# Altium PCB BRK7360.PcbDoc (part 2 of 3)
Units mil, origin at the board's own origin, x right, y up, seen from the top; angles counter-clockwise.
Board outline 7086.61 x 3956.69 mil, 4 copper layers (L1-Top, L2-Plane-1, L3-Plane-2, L4-Bottom), stack 61.722 mil thick; 106 components, 276 nets, 968 pads, 441 vias.
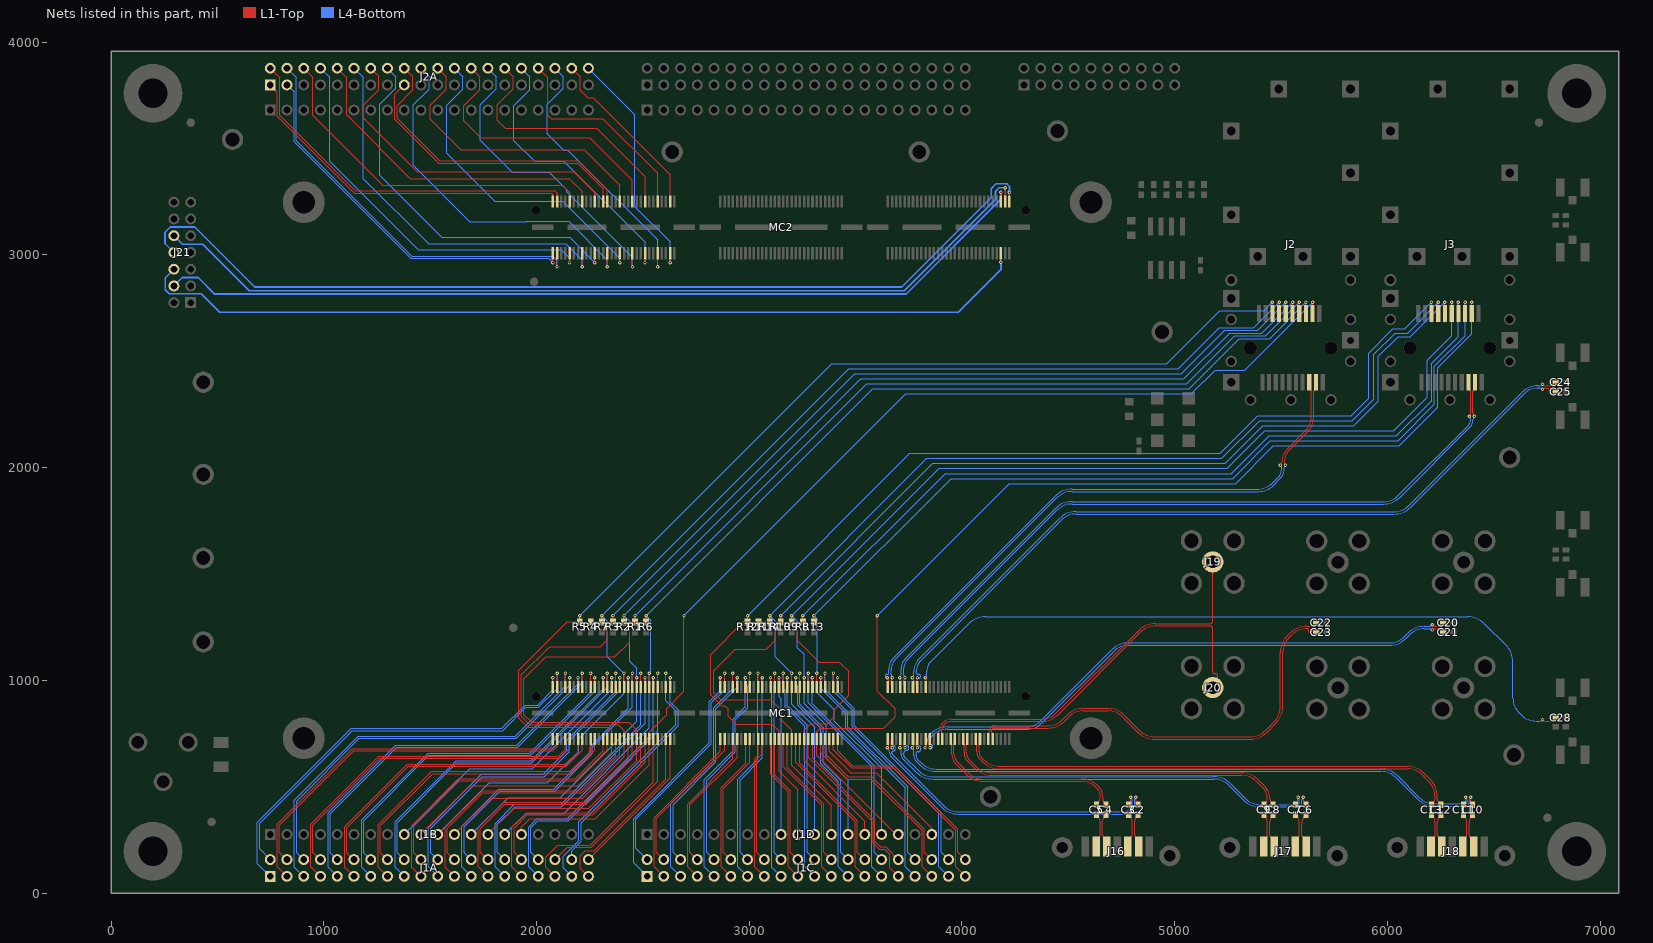
[diagram p4: the nets of this part, all layers, seen from the top]

## Via types
v1: diameter 16, hole 8, L1-Top to L4-Bottom, tented both sides, 441 vias

## Nets (pads, with @x,y where several pads share a name; then routed paths per layer and width w, separated by ;. In a path a pad name is that pad's centre, name@x,y a point inside that pad or via, vN(x,y) a via of type N, cw(c..) or ccw(c..) an arc to the next point about the centre after c; other vN are vias at no path point) (continued)
GTX115_TXN1: C25.2 MC1.135 | length 3671.3
  L1-Top w5.24: MC1.135@3789.37,968.11 cw(c3797.51,976.25) 3786,976.25 3786,999.93 cw(c3803.07,999.93) v1(3791,1012) ; v1(6729,2368) cw(c6744.43,2352.57) 6744.43,2374.39 6764,2374.39 cw(c6764,2356.02) 6776.99,2369.01 6785.17,2360.83 ccw(c6792,2367.66) C25.2@6792,2358
  L4-Bottom w5.24: v1(3791,1012) ccw(c3792,1012.02) 3792,1011 3800,1011 ccw(c3800,1016) 3805,1016 3805,1020 ccw(c3796,1020) 3796,1029 3793,1029 cw(c3793,1037) 3785,1037 3785,1040 cw(c3862.25,1040) 3807.63,1094.63 4465.49,1752.49 cw(c4536.2,1681.78) 4536.2,1781.78 6030.71,1781.78 ccw(c6030.71,1893) 6109.36,1814.36 6642.09,2347.09 cw(c6708,2281.18) 6708,2374.39 6713.57,2374.39 cw(c6713.57,2352.57) v1(6729,2368)
GTX115_TXN2: J3.19 MC1.129 | length 3447.2
  L1-Top w5.24: MC1.129@3730.32,968.11 cw(c3738.32,976.12) 3727,976.12 3727,999.93 cw(c3744.07,999.93) v1(3732,1012) ; v1(6409,2242) cw(c6425.74,2258.74) 6402.07,2258.74 6402.07,2356.92 cw(c6412.08,2356.92) 6405,2364 ccw(c6387.61,2381.39) 6412.2,2381.39 J3.19@6412.2,2401.57
  L4-Bottom w5.24: v1(3732,1012) cw(c3746.49,1026.49) 3726,1026.49 3726,1058 cw(c3776.7,1058) 3740.85,1093.85 4446.49,1799.49 cw(c4517.2,1728.78) 4517.2,1828.78 5980.58,1828.78 ccw(c5980.58,1940) 6059.22,1861.36 6387.17,2189.3 ccw(c6349.9,2226.57) 6402.61,2226.57 cw(c6424.43,2226.57) v1(6409,2242)
GTX115_TXN3: J2.19 MC1.123 | length 2825.8
  L1-Top w5.24: MC1.123@3671.26,987.13 MC1.123@3671.26,968.11 cw(c3679.13,975.98) 3668,975.98 3668,999.93 cw(c3685.07,999.93) v1(3673,1012) ; v1(5521,2012) 5519.95,2013.05 cw(c5531.9,2025) 5515,2025 cw(c5594.99,2025) 5538.43,2081.56 5621.46,2164.59 ccw(c5542.81,2243.24) 5654.04,2243.24 5654.04,2359.26 cw(c5660.74,2359.26) 5656,2364 ccw(c5636.27,2383.73) 5664.17,2383.73 J2.19@5664.17,2401.57
  L4-Bottom w5.24: v1(3673,1012) cw(c3687.49,1026.49) 3667,1026.49 3667,1050.72 cw(c3735.28,1050.72) 3687,1099 4446.49,1858.49 cw(c4517.2,1787.78) 4517.2,1887.78 5394.23,1887.78 ccw(c5394.23,1987.78) 5464.94,1917.07 5494.94,1947.07 ccw(c5445.96,1996.04) 5515.22,1996.04 5515.22,2001.63 cw(c5531.37,2001.63) v1@5519.95,2013.05
GTX115_TXP0: C28.2 MC1.139 | length 3494.4
  L1-Top w5.24: v1(3827,1012) cw(c3814.93,999.93) 3832,999.93 3832,975.98 cw(c3820.87,975.98) MC1.139@3828.74,968.11 ; v1(6729,815) ccw(c6744.43,830.43) 6744.43,808.61 6765,808.61 ccw(c6765,822.15) 6774.58,812.58 6783.9,821.9 cw(c6791.38,814.43) C28.2@6791.38,825
  L4-Bottom w5.24: v1(3827,1012) 3827.26,1012.26 ccw(c3811.52,1028) 3833.78,1028 3833.78,1042 cw(c3898.11,1042) 3852.62,1087.49 4031.78,1266.64 cw(c4110.42,1188) 4110.42,1299.22 6377.58,1299.22 cw(c6377.58,1188) 6456.22,1266.64 6557.42,1165.44 cw(c6478.78,1086.8) 6590,1086.8 6590,916.6 ccw(c6685.6,916.6) 6618,849 6629.1,837.9 ccw(c6699.81,908.61) 6699.81,808.61 6713.57,808.61 ccw(c6713.57,830.43) v1(6729,815)
GTX115_TXP1: C24.2 MC1.133 | length 3669.7
  L1-Top w5.24: v1(3767,1012) cw(c3752.51,997.51) 3773,997.51 3773,976.11 cw(c3761.68,976.11) MC1.133@3769.69,968.11 ; v1(6729,2392) ccw(c6744.43,2407.43) 6744.43,2385.61 6764,2385.61 ccw(c6764,2403.98) 6776.99,2390.99 6783.46,2397.46 cw(c6792,2388.93) C24.2@6792,2401
  L4-Bottom w5.24: v1@3770.8,1015.8 v1(3767,1012) ccw(c3750.63,1028.37) 3773.78,1028.37 3773.78,1040 cw(c3862.26,1040) 3799.69,1102.56 4457.56,1760.42 cw(c4536.2,1681.78) 4536.2,1793 6030.71,1793 ccw(c6030.71,1893) 6101.42,1822.29 6634.15,2355.02 cw(c6708,2281.18) 6708,2385.61 6713.57,2385.61 ccw(c6713.57,2407.43) v1(6729,2392)
GTX115_TXP2: J3.18 MC1.127 | length 3447.4
  L1-Top w5.24: v1(3708,1012) cw(c3693.51,997.51) 3714,997.51 3714,976.25 cw(c3702.5,976.25) MC1.127@3710.63,968.11 ; J3.18@6380.71,2401.57 6380.71,2381.6 ccw(c6405.6,2381.6) 6388,2364 cw(c6381.13,2357.13) 6390.85,2357.13 6390.85,2256.11 cw(c6370.89,2256.11) v1(6385,2242)
  L4-Bottom w5.24: v1(3708,1012) ccw(c3691.63,1028.37) 3714.78,1028.37 3714.78,1058 cw(c3776.7,1058) 3732.92,1101.78 4438.56,1807.42 cw(c4517.2,1728.78) 4517.2,1840 5980.58,1840 ccw(c5980.58,1940) 6051.29,1869.29 6379.24,2197.24 ccw(c6349.9,2226.57) 6391.39,2226.57 ccw(c6369.57,2226.57) v1(6385,2242)
GTX115_TXP3: J2.18 MC1.121 | length 2821.8
  L1-Top w5.24: v1(3649,1012) cw(c3634.51,997.51) 3655,997.51 3655,976.38 cw(c3643.31,976.38) MC1.121@3651.58,968.11 ; v1(5497,2012) 5499.38,2014.38 ccw(c5488.76,2025) 5503.78,2025 cw(c5594.99,2025) 5530.49,2089.49 5613.53,2172.53 ccw(c5542.81,2243.24) 5642.81,2243.24 5642.81,2359.62 ccw(c5636.62,2359.62) 5641,2364 cw(c5661.09,2384.09) 5632.68,2384.09 J2.18@5632.68,2401.57
  L4-Bottom w5.24: v1(3649,1012) 3648,1012 cw(c3648,1021) 3639,1021 cw(c3646,1021) 3646,1028 3649,1028 ccw(c3649,1034.78) 3655.78,1034.78 3655.78,1050.72 cw(c3735.28,1050.72) 3679.07,1106.93 4438.56,1866.42 cw(c4517.2,1787.78) 4517.2,1899 5384.93,1899 ccw(c5384.93,2010.22) 5463.58,1931.58 5487,1955 ccw(c5445.96,1996.04) 5504,1996.04 5504,1999 ccw(c5489.52,1999) 5499.76,2009.24 v1(5497,2012)
GTX116_REFCLK0N: J20.1 MC1.148 | length 1822
  L1-Top w5.24: MC1.148@3907.48,724.8 3907.48,745.01 ccw(c3899.01,745.01) 3905,751 cw(c3909.83,755.83) 3903,755.83 3903,757 cw(c3953.7,757) 3917.85,792.85 3918,793 cw(c3951.27,759.73) 3951.27,806.78 4372.71,806.78 ccw(c4372.71,918) 4451.36,839.36 4838.41,1226.41 cw(c4909.12,1155.7) 4909.12,1255.7 5168.58,1255.7 cw(c5168.58,1246.28) 5178,1246.28 5178,1040.8 ccw(c5186.9,1040.8) 5186.9,1031.9 5192.5,1031.9 cw(c5192.5,1022.2) 5202.2,1022.2 cw(c5123.5,1022.2) 5179.15,966.55 J20.1@5178.74,966.14
GTX116_REFCLK0P: J19.1 MC1.146 | length 1817.9
  L1-Top w5.24: MC1.146@3887.8,724.8 3887.8,745.68 cw(c3895.32,745.68) 3890,751 ccw(c3885.7,755.3) 3891.78,755.3 3891.78,757 cw(c3953.7,757) 3909.92,800.78 3910.07,800.93 cw(c3951.27,759.73) 3951.27,818 4372.71,818 ccw(c4372.71,918) 4443.42,847.29 4830.48,1234.34 cw(c4909.12,1155.7) 4830.53,1234.4 cw(c4909.12,1155.7) 4909.12,1266.92 5168.6,1266.92 ccw(c5168.6,1277.22) 5178.9,1277.22 5178.9,1556.69 J19.1@5178.74,1556.69
GTX116_RXN0: C23.2 MC1.172 | length 2062.7
  L1-Top w5.24: MC1.172@4143.7,724.8 4143.7,746.89 ccw(c4137.89,746.89) 4142,751 cw(c4146.83,755.83) 4140,755.83 4140,764.76 cw(c4150.24,764.76) 4143,772 cw(c4152.12,762.88) 4152.12,775.78 4403.71,775.78 ccw(c4403.71,887) 4482.36,808.36 4501.71,827.71 cw(c4572.42,757) 4572.42,857 4684.71,857 cw(c4684.71,757) 4755.42,827.71 4826.78,756.36 ccw(c4905.42,835) 4905.42,723.78 5355.58,723.78 ccw(c5355.58,835) 5434.22,756.36 5475.42,797.56 ccw(c5396.78,876.2) 5508,876.2 5508,1130.58 cw(c5608,1130.58) 5537.29,1201.29 5549.6,1213.6 cw(c5620.31,1142.89) 5620.31,1242.89 cw(c5620.31,1234.2) 5629,1234.2 5629,1232 ccw(c5636,1232) 5636,1225 5639,1225 ccw(c5639,1230) 5644,1230 cw(c5650,1230) 5650,1236 5656.35,1236 cw(c5656.35,1227) C23.2@5665.35,1227
GTX116_RXN1: C12.2 MC1.166 | length 2366.6
  L1-Top w5.24: MC1.166@4084.65,724.8 4080.5,690 4080.5,664.35 ccw(c4116.35,664.35) 4091,639 4104.49,625.51 ccw(c4175.2,696.22) 4175.2,596.22 6092.58,596.22 cw(c6092.58,485) 6171.22,563.64 6202.53,532.33 cw(c6123.89,453.69) 6235.11,453.69 6235.11,440 ccw(c6255.6,440) 6241.11,425.51 C12.2@6251,415.62
GTX116_RXN1_C: C12.1 J18.5 | length 159.8
  L1-Top w5.24: C12.1@6251,368.38 6248.38,365.76 ccw(c6280.42,333.72) 6235.11,333.72 6235.11,273 ccw(c6247.45,273) 6238.72,264.28 6239,264 cw(c6200.56,225.56) 6254.92,225.56 J18.5@6254.92,218.5
GTX116_RXN2: C8.2 MC1.160 | length 1630.7
  L1-Top w5.24: 5392.24,532.67 5424.81,500.1 cw(c5370.72,446) 5447.22,446 ccw(c5482.46,446) 5457.54,421.08 C8.2@5463,415.62
  L1-Top w5.25: MC1.160@4025.59,724.8 4021,696 4021,661 ccw(c4069.28,661) 4035.14,626.86 4067.46,594.54 ccw(c4138.17,665.25) 4138.17,565.25 5313.58,565.25 cw(c5313.58,454) 5392.24,532.67
GTX116_RXN2_C: C8.1 J17.5 | length 160
  L1-Top w5.24: C8.1@5463,368.38 5460.38,365.76 ccw(c5492.42,333.72) 5447.11,333.72 5447.11,273.39 ccw(c5460.39,273.39) 5451,264 cw(c5411.12,224.12) 5467.52,224.12 J17.5@5467.52,218.5
GTX116_RXN3: C4.2 MC1.154 | length 913.7
  L1-Top w5.24: 4660.61,461.94 4660.61,446 ccw(c4688.64,446) 4668.82,426.18 4677.69,417.31 C4.2@4680,415
  L1-Top w5.25: MC1.154@3966.54,724.8 3962,696 3962,656 ccw(c4019.94,656) 3978.97,615.03 4028.46,565.54 ccw(c4099.17,636.25) 4099.17,536.25 4559.58,536.25 cw(c4559.58,425) 4638.24,503.67 4646.96,494.96 cw(c4613.95,461.95) 4660.62,461.95
GTX116_RXN3_C: C4.1 J16.5 | length 160.2
  L1-Top w5.24: C4.1@4676,368.38 4671.06,363.44 ccw(c4697.5,337) 4660.11,337 4660.11,273.39 ccw(c4673.39,273.39) 4664,264 cw(c4625.09,225.09) 4680.12,225.09 J16.5@4680.12,218.5
GTX116_RXP0: C22.2 MC1.170 | length 2062.8
  L1-Top w5.24: MC1.170@4124.02,724.8 4124.02,746.21 cw(c4130.79,746.21) MC1.170@4125.99,750.99 ; MC1.170@4126,751 4126.5,751.5 ccw(c4121,757) 4128.78,757 4128.78,764.76 cw(c4150.24,764.76) 4135.07,779.93 cw(c4152.12,762.88) 4152.12,787 4403.71,787 ccw(c4403.71,887) 4474.42,816.29 4493.78,835.64 cw(c4572.42,757) 4572.42,868.22 4684.71,868.22 cw(c4684.71,757) 4763.36,835.64 4834.71,764.29 ccw(c4905.42,835) 4905.42,735 5355.58,735 ccw(c5355.58,835) 5426.29,764.29 5467.49,805.49 ccw(c5396.78,876.2) 5496.78,876.2 5496.78,1130.58 cw(c5608,1130.58) 5529.36,1209.22 5541.67,1221.53 cw(c5620.31,1142.89) 5620.31,1254.11 5631,1254.11 ccw(c5631,1298.69) 5662.52,1267.17 C22.2@5665.35,1270
GTX116_RXP1: C13.2 MC1.164 | length 2366.6
  L1-Top w5.24: MC1.164@4064.96,724.8 4069.28,690 4069.28,664.35 ccw(c4116.35,664.35) 4083.07,631.07 4096.56,617.58 ccw(c4175.2,696.22) 4175.2,585 6092.58,585 cw(c6092.58,485) 6163.29,555.71 6194.6,524.4 cw(c6123.89,453.69) 6223.89,453.69 6223.89,440 cw(c6203.4,440) 6217.89,425.51 C13.2@6208,415.62
GTX116_RXP1_C: C13.1 J18.6 | length 159.6
  L1-Top w5.24: J18.6@6204.92,218.5 6204.92,225.18 cw(c6259.82,225.18) 6221,264 ccw(c6214.02,270.98) 6223.89,270.98 6223.89,333.72 ccw(c6178.58,333.72) 6210.62,365.76 C13.1@6208,368.38
GTX116_RXP2: C9.2 MC1.158 | length 1630.7
  L1-Top w5.24: 5384.29,524.71 5416.91,492.09 cw(c5370.82,446) 5436,446 cw(c5401.29,446) 5425.83,421.46 C9.2@5420,415.62
  L1-Top w5.25: MC1.158@4005.91,724.8 4009.75,696 4009.75,661 ccw(c4069.28,661) 4027.19,618.9 4059.51,586.58 ccw(c4138.17,665.25) 4138.17,554 5313.58,554 cw(c5313.58,454) 5384.29,524.71
GTX116_RXP2_C: C9.1 J17.6 | length 159.4
  L1-Top w5.24: J17.6@5417.52,218.5 5417.52,226.63 cw(c5470.37,226.63) 5433,264 ccw(c5426.02,270.98) 5435.89,270.98 5435.89,333.72 ccw(c5390.58,333.72) 5422.62,365.76 C9.1@5420,368.38
GTX116_RXP3: C5.2 MC1.152 | length 913.6
  L1-Top w5.24: C5.2@4630,415 4631.81,416.81 4641.18,426.18 ccw(c4621.36,446) 4649.39,446 4649.39,461.94
  L1-Top w5.25: MC1.152@3946.85,724.8 3950.75,696.19 3950.75,656 ccw(c4019.94,656) 3971.02,607.07 4020.51,557.58 ccw(c4099.17,636.25) 4099.17,525 4559.58,525 cw(c4559.58,425) 4630.29,495.71 4639,487 cw(c4613.95,461.95) 4649.38,461.95
GTX116_RXP3_C: C5.1 J16.6 | length 159.9
  L1-Top w5.24: J16.6@4630.12,218.5 4630.12,225.66 cw(c4684.34,225.66) 4646,264 ccw(c4639.02,270.98) 4648.89,270.98 4648.89,337 ccw(c4611.5,337) 4637.94,363.44 C5.1@4633,368.38
GTX116_TXN0: C21.2 MC1.142 | length 2722.5
  L1-Top w5.24: MC1.142@3848.43,724.8 ccw(c3856.7,716.53) 3845,716.53 3845,695.07 ccw(c3862.07,695.07) v1(3850,683) ; v1(6211,1237) cw(c6226.43,1221.57) 6226.43,1243.39 6241,1243.39 cw(c6241,1237.09) 6245.45,1241.55 ; 6245.46,1241.54 6258.32,1228.68 ccw(c6262.38,1232.74) C21.2@6262.38,1227
  L4-Bottom w5.24: 3845,704 ccw(c3852,704) 3852,697 3855,697 cw(c3855,690) 3862,690 cw(c3855,690) 3855,683 v1(3850,683) ; 3845,704 cw(c3895.7,704) 3859.85,739.85 3860.49,740.49 cw(c3931.2,669.78) 3931.2,769.78 4300.71,769.78 ccw(c4300.71,881) 4379.36,802.36 4712.49,1135.49 cw(c4783.2,1064.78) 4783.2,1164.78 6008.71,1164.78 ccw(c6008.71,1276) 6087.36,1197.36 6103.1,1213.1 cw(c6173.81,1142.39) 6173.81,1242.39 6197.99,1242.39 cw(c6197.99,1223.99) v1(6211,1237)
GTX116_TXN1: C11.2 MC1.136 | length 2863.4
  L1-Top w5.24: MC1.136@3789.37,724.8 ccw(c3797.51,716.67) 3786,716.67 3786,695.07 ccw(c3803.07,695.07) v1(3791,683) ; C11.2@6358,415.62 ccw(c6358,425.62) 6368,425.62 v1(6368,450)
  L4-Bottom w5.24: v1(3791,683) 3791,684 cw(c3798,684) 3798,691 cw(c3798,683) 3806,683 3806,676 cw(c3795,676) 3795,665 3791,665 ccw(c3791,658) 3784,658 3784,647.31 ccw(c3811.31,647.31) 3791.99,628.01 3807.49,612.51 ccw(c3878.2,683.22) 3878.2,583.22 5969.71,583.22 cw(c5969.71,472) 6048.36,550.64 6149.71,449.29 ccw(c6220.42,520) 6220.42,420 6366,420 ccw(c6366,428.39) 6374.39,428.39 6374.39,434.57 ccw(c6352.57,434.57) v1(6368,450)
GTX116_TXN1_C: C11.1 J18.3 | length 159.6
  L1-Top w5.24: J18.3@6354.92,218.5 6354.92,227.6 cw(c6406.4,227.6) 6370,264 6370.28,264.28 ccw(c6361.55,273) 6373.89,273 6373.89,333.72 ccw(c6328.58,333.72) 6360.62,365.76 C11.1@6358,368.38
GTX116_TXN2: C7.2 MC1.130 | length 2135.9
  L1-Top w5.24: MC1.130@3730.32,724.8 ccw(c3738.32,716.8) 3727,716.8 3727,695.07 ccw(c3744.07,695.07) v1(3732,683) ; C7.2@5567,415 ccw(c5535.62,446.38) 5580,446.38 v1(5580,450)
  L4-Bottom w5.24: v1(3732,683) cw(c3741,683) 3741,692 3742,692 cw(c3742,685) 3749,685 3749,679 cw(c3741,679) 3741,671 ccw(c3741,655) 3725,655 3725,651.36 ccw(c3740.36,651.36) 3729.5,640.5 3793.49,576.51 ccw(c3864.2,647.22) 3864.2,547.22 5183.71,547.22 cw(c5183.71,436) 5262.36,514.64 5331.71,445.29 ccw(c5402.42,516) 5402.42,416 5576.39,416 ccw(c5576.39,426) 5586.39,426 5586.39,434.57 ccw(c5564.57,434.57) v1(5580,450)
GTX116_TXN2_C: C7.1 J17.3 | length 159.9
  L1-Top w5.24: C7.1@5567,367.76 5569.62,365.14 cw(c5529.13,324.65) 5586.39,324.65 5586.39,272.18 cw(c5574.82,272.18) 5583,264 ccw(c5620.37,226.63) 5567.52,226.63 J17.3@5567.52,218.5
GTX116_TXN3: C3.2 MC1.124 | length 1453.4
  L1-Top w5.24: C3.2@4784,415.62 ccw(c4762.27,437.35) 4793,437.35 v1(4793,450)
  L1-Top w5.25: MC1.124@3671.26,724.8 ccw(c3671.26,721.54) 3668,721.54 3668,688 ccw(c3673,688) v1(3673,683) ; C3.2@4780,415 4782.31,417.31 C3.2@4789,424
  L4-Bottom w5.24: v1(3673,683) 3673,687 cw(c3679,687) 3679,693 cw(c3679,685) 3687,685 3687,676 cw(c3679,676) 3679,668 3676,668 ccw(c3676,662) 3670,662 3670,659.58 ccw(c3681.06,659.58) 3673.24,651.76 3912.71,412.29 ccw(c3983.42,483) 3983.42,383 4754.37,383 ccw(c4754.37,437.63) 4793,399 ccw(c4776.1,415.9) 4800,415.9 4800,438 ccw(c4787.93,438) 4796.47,446.53 v1(4793,450)
GTX116_TXN3_C: C3.1 J16.3 | length 160
  L1-Top w5.24: J16.3@4780.12,218.5 4780.12,225.66 cw(c4834.34,225.66) 4796,264 ccw(c4786.61,273.39) 4799.89,273.39 4799.89,336 ccw(c4760.08,336) 4788.23,364.15 C3.1@4784,368.38
GTX116_TXP0: C20.2 MC1.140 | length 2722.5
  L1-Top w5.24: v1(3826,683) 3826.34,683.34 ccw(c3812.69,697) 3832,697 3832,716.94 ccw(c3820.87,716.94) MC1.140@3828.74,724.8 ; v1(6211,1261) ccw(c6226.43,1276.43) 6226.43,1254.61 6241,1254.61 ccw(c6241,1263.33) 6247.16,1257.16 6258.32,1268.32 cw(c6262.38,1264.26) C20.2@6262.38,1270
  L4-Bottom w5.24: v1(3826,683) ccw(c3807.22,701.78) 3833.78,701.78 3833.78,704 cw(c3895.7,704) 3851.92,747.78 3852.56,748.42 cw(c3931.2,669.78) 3931.2,781 4300.71,781 ccw(c4300.71,881) 4371.42,810.29 4704.56,1143.42 cw(c4783.2,1064.78) 4783.2,1176 6008.71,1176 ccw(c6008.71,1276) 6079.42,1205.29 6095.17,1221.03 cw(c6173.81,1142.39) 6173.81,1253.61 6193.16,1253.61 ccw(c6193.16,1278.84) v1(6211,1261)
GTX116_TXP1: C10.2 MC1.134 | length 2862.8
  L1-Top w5.24: v1(3767,683) 3767.34,683.34 ccw(c3753.69,697) 3773,697 3773,716.8 ccw(c3761.68,716.8) MC1.134@3769.69,724.8 ; v1(6392,450) 6392,424.62 ccw(c6401,424.62) C10.2@6401,415.62
  L4-Bottom w5.24: v1(3767,683) cw(c3767,677.22) 3772.78,677.22 3772.78,647.31 ccw(c3811.31,647.31) 3784.07,620.07 3799.56,604.58 ccw(c3878.2,683.22) 3878.2,572 5969.71,572 cw(c5969.71,472) 6040.42,542.71 6141.78,441.36 ccw(c6220.42,520) 6220.42,408.78 6366,408.78 ccw(c6366,428.39) 6385.61,428.39 6385.61,434.57 cw(c6407.43,434.57) v1(6392,450)
GTX116_TXP1_C: C10.1 J18.2 | length 159.8
  L1-Top w5.24: C10.1@6401,368.38 6398.38,365.76 ccw(c6430.42,333.72) 6385.11,333.72 6385.11,273 ccw(c6397.45,273) 6388.72,264.28 6389,264 cw(c6350.56,225.56) 6404.92,225.56 J18.2@6404.92,218.5
GTX116_TXP2: C6.2 MC1.128 | length 2132.9
  L1-Top w5.24: v1(3708,683) ccw(c3693.51,697.49) 3714,697.49 3714,716.67 ccw(c3702.5,716.67) MC1.128@3710.63,724.8 ; v1(5604,450) 5604,446.38 ccw(c5648.38,446.38) C6.2@5617,415
  L4-Bottom w5.24: v1(3708,683) cw(c3708,677.22) 3713.78,677.22 3713.78,651.36 ccw(c3740.36,651.36) 3721.57,632.57 3785.56,568.58 ccw(c3864.2,647.22) 3864.2,536 5183.71,536 cw(c5183.71,436) 5254.42,506.71 5323.78,437.36 ccw(c5402.42,516) 5402.42,404.78 5576.39,404.78 ccw(c5576.39,426) 5597.61,426 5597.61,434.57 cw(c5619.43,434.57) v1(5604,450)
GTX116_TXP2_C: C6.1 J17.2 | length 160.3
  L1-Top w5.24: C6.1@5617,367.76 5614.38,365.14 ccw(c5654.87,324.65) 5597.61,324.65 5597.61,273 ccw(c5608.74,273) 5600.87,265.13 5602,264 cw(c5564.53,226.53) 5617.52,226.53 J17.2@5617.52,218.5
GTX116_TXP3: C2.2 MC1.122 | length 1454.1
  L1-Top w5.24: v1(4817,450) 4817,439.76 ccw(c4851.14,439.76) C2.2@4827,415.62
  L1-Top w5.25: v1(3649,683) ccw(c3649,689) 3655,689 3655,699 3651.58,699 MC1.122@3651.58,724.8 ; C2.2@4821,424 4828.19,416.81 C2.2@4830,415
  L4-Bottom w5.24: 3670.36,638.73 3904.73,404.36 ccw(c3983.38,483) 3983.38,371.78 4754.37,371.78 ccw(c4754.37,437.63) 4800.93,391.07 ccw(c4776.1,415.9) 4811.22,415.9 4811.22,438 cw(c4826.24,438) 4815.62,448.62 v1(4817,450)
  L4-Bottom w5.25: v1(3649,683) 3654.16,677.84 cw(c3650.32,674) 3655.75,674 ccw(c3705.63,674) 3670.36,638.73
GTX116_TXP3_C: C2.1 J16.2 | length 159.8
  L1-Top w5.24: C2.1@4827,368.38 4822.77,364.15 ccw(c4850.92,336) 4811.11,336 4811.11,273.39 ccw(c4824.39,273.39) 4815,264 cw(c4778.5,227.5) 4830.12,227.5 J16.2@4830.12,218.5
JTAG_TCK: J21.6 MC2.176 | length 4247.6
  L1-Top w5: v1(4183,2965) v1(4183,2965) MC2.176@4183.07,3008.27
  L4-Bottom w8: J21.6@295.28,2933.07 254,2891.8 254,2836 273,2817 423,2817 510,2730 3982,2730 4183,2931 v1(4183,2965)
JTAG_TDI: J21.10 MC2.177 | length 4302.1
  L1-Top w8: MC2.177@4202.76,3251.58 4202.76,3315.76 v1(4203,3316)
  L4-Bottom w8: J21.10@295.28,3090.55 335.83,3050 431,3050 649,2832 3728,2832 4158,3262 4158,3300 4174,3316 v1(4203,3316)
JTAG_TDO: J21.8 MC2.179 | length 4509.1
  L1-Top w8: MC2.179@4222.44,3251.58 4222.44,3294.44 v1(4223,3295)
  L4-Bottom w8: J21.8@295.28,3011.81 253,3054.09 253,3106 278,3131 393,3131 675,2849 3716,2849 4137,3270 4137,3311 4160,3334 4210.46,3334 4223,3321.46 v1(4223,3295)
JTAG_TMS: J21.4 MC2.175 | length 4197.7
  L1-Top w8: v1(4183,3295) 4183.07,3294.93 MC2.175@4183.07,3251.58
  L4-Bottom w8: J21.4@295.28,2854.33 334.94,2894 410,2894 488,2816 3737,2816 4183,3262 v1(4183,3295)
MC1_B15_CLK_N: J1A.18 MC1.27 | length 1569.7
  L1-Top w5: MC1.27@2332.68,968.11 2332.68,1032.79 v1(2332.89,1033)
  L4-Bottom w5: J1A.18@1377.95,157.48 1344.86,190.57 1344.86,330.86 1626,612 1978.14,612 2332.89,966.75 v1(2332.89,1033)
MC1_B15_CLK_P: J1A.17 MC1.25 | length 1606.4
  L1-Top w5: v1(2312.89,1012) 2312.99,1011.9 MC1.25@2312.99,968.11
  L4-Bottom w5: J1A.17@1377.95,78.74 1334.86,121.83 1334.86,335 1621.86,622 1974,622 2312.89,960.89 v1(2312.89,1012)
MC1_B15_N0: J1A.2 MC1.3 | length 1989.5
  L1-Top w5: MC1.3@2096.46,968.11 2096.46,1032.57 v1(2096.89,1033)
  L4-Bottom w5: J1A.2@748.03,157.48 698,207.51 698,328 1134,764 1841.14,764 1950.14,873 2009,873 2096.89,960.89 v1(2096.89,1033)
MC1_B15_N1: J1A.4 MC1.4 | length 1670.4
  L1-Top w5: J1A.4@826.77,157.48 791.12,193.13 791.12,319.98 1140.14,669 2075,669 2096.46,690.46 MC1.4@2096.46,724.8
MC1_B15_N2: J1A.6 MC1.9 | length 1876.2
  L1-Top w5: MC1.9@2155.51,968.11 2155.51,1011.62 v1(2155.89,1012)
  L4-Bottom w5: J1A.6@905.51,157.48 872.42,190.57 872.42,432.42 1167,727 1905,727 2155.89,977.89 v1(2155.89,1012)
MC1_B15_N3: J1A.8 MC1.10 | length 1577.6
  L1-Top w5: J1A.8@984.25,157.48 948.6,193.13 948.6,319.46 1262.14,633 2108.14,633 2155.51,680.37 MC1.10@2155.51,724.8
MC1_B15_N4: J1A.10 MC1.15 | length 1778.4
  L1-Top w5: MC1.15@2214.57,968.11 2214.57,1032.68 v1(2214.89,1033)
  L4-Bottom w5: J1A.10@1062.99,157.48 1029.9,190.57 1029.9,373.9 1342,686 1911,686 2214.89,989.89 v1(2214.89,1033)
MC1_B15_N5: J1A.12 MC1.16 | length 1474.4
  L1-Top w5: J1A.12@1141.73,157.48 1108.64,190.57 1108.64,307.5 1397.14,596 2140.14,596 2214.57,670.43 MC1.16@2214.57,724.8
MC1_B15_N6: J1A.14 MC1.21 | length 1642.3
  L1-Top w5: MC1.21@2273.62,968.11 2273.62,1011.73 v1(2273.89,1012)
  L4-Bottom w5: J1A.14@1220.47,157.48 1187.38,190.57 1187.38,340.38 1494,647 1972,647 2273.89,948.89 v1(2273.89,1012)
MC1_B15_N7: J1A.16 MC1.22 | length 1380.3
  L1-Top w5: J1A.16@1299.21,157.48 1266.12,190.57 1266.12,316.98 1511.14,562 2163.14,562 2273.62,672.48 MC1.22@2273.62,724.8
MC1_B15_N8: J1A.20 MC1.28 | length 1278.7
  L1-Top w5: J1A.20@1456.69,157.48 1423.6,190.57 1423.6,313.6 1637,527 2185.14,527 2332.68,674.54 MC1.28@2332.68,724.8
MC1_B15_N9: J1A.22 MC1.33 | length 1451
  L1-Top w5: MC1.33@2391.73,968.11 2391.73,1011.84 v1(2391.89,1012)
  L4-Bottom w5: J1A.22@1535.43,157.48 1502.34,190.57 1502.34,305.2 1745.14,548 2036,548 2153,665 2153,715 2391.89,953.89 v1(2391.89,1012)
MC1_B15_N10: J1A.24 MC1.34 | length 1188.7
  L1-Top w5: J1A.24@1614.17,157.48 1581.08,190.57 1581.08,305.08 1748,472 2212.14,472 2391.73,651.59 MC1.34@2391.73,724.8
MC1_B15_N11: J1A.26 MC1.39 | length 1433.6
  L1-Top w5: MC1.39@2450.79,968.11 2450.79,1032.9 v1(2450.89,1033)
  L4-Bottom w5: J1A.26@1692.91,157.48 1659.82,190.57 1659.82,311.82 1827,479 2086.14,479 2262,654.86 2262,684.86 2450.89,873.75 v1(2450.89,1033)
MC1_B15_N12: J1A.28 MC1.40 | length 1102.6
  L1-Top w5: J1A.28@1771.65,157.48 1736,193.13 1736,302 1851,417 2234.14,417 2450.79,633.65 MC1.40@2450.79,724.8
MC1_B15_N13: J1A.30 MC1.45 | length 1330
  L1-Top w5: MC1.45@2509.84,968.11 2509.84,1011.95 v1(2509.89,1012)
  L4-Bottom w5: J1A.30@1850.39,157.48 1814.74,193.13 1814.74,322.6 1899.14,407 2119.14,407 2509.89,797.75 v1(2509.89,1012)
MC1_B15_N14: J1A.32 MC1.46 | length 1015.4
  L1-Top w5: J1A.32@1929.13,157.48 1895,191.61 1895,305.86 1957.14,368 2263.14,368 2509.84,614.7 MC1.46@2509.84,724.8
MC1_B15_N15: J1A.34 MC1.51 | length 1286.1
  L1-Top w5: MC1.51@2568.9,968.11 v1(2568.89,1033)
  L4-Bottom w5: J1A.34@2007.87,157.48 1972.22,193.13 1972.22,306.08 2006.14,340 2149.14,340 2568.89,759.75 v1(2568.89,1033)
MC1_B15_N16: J1A.36 MC1.52 | length 833.2
  L1-Top w5: J1A.36@2086.61,157.48 2144.13,215 2257,215 2568.9,526.9 MC1.52@2568.9,724.8
MC1_B15_N17: J1A.38 MC1.57 | length 1120.8
  L1-Top w5: v1(2627.89,1012) 2627.95,1011.94 MC1.57@2627.95,968.11
  L4-Bottom w5: J1A.38@2165.35,157.48 2165.35,199.21 2209,242.86 2209,330.86 2665,786.86 2665,861.14 2627.89,898.25 v1(2627.89,1012)
MC1_B15_N18: J1A.40 MC1.58 | length 726.3
  L1-Top w5: J1A.40@2244.09,157.48 2627.95,541.34 MC1.58@2627.95,724.8
MC1_B15_P0: J1A.1 MC1.1 | length 2026.1
  L1-Top w5: MC1.1@2076.77,968.11 2076.77,1011.88 v1(2076.89,1012)
  L4-Bottom w5: J1A.1@748.03,78.74 688,138.77 688,332.14 1129.86,774 1837,774 1946,883 2004.86,883 2076.89,955.03 v1(2076.89,1012)
MC1_B15_P1: J1A.3 MC1.2 | length 1743.5
  L1-Top w5: J1A.3@826.77,78.74 781.12,124.39 781.12,324.12 1136,679 2061,679 2076.77,694.77 MC1.2@2076.77,724.8
MC1_B15_P2: J1A.5 MC1.7 | length 1997.2
  L1-Top w5: MC1.7@2135.83,968.11 2135.83,1032.94 v1(2135.89,1033)
  L4-Bottom w5: J1A.5@905.51,78.74 862,122.25 862,436.14 1162.86,737 1900.86,737 2135.89,972.03 v1(2135.89,1033)
MC1_B15_P3: J1A.7 MC1.8 | length 1656.5
  L1-Top w5: J1A.7@984.25,78.74 938.6,124.39 938.6,323.6 1258,643 2104,643 2135.83,674.83 MC1.8@2135.83,724.8
MC1_B15_P4: J1A.9 MC1.13 | length 1815
  L1-Top w5: MC1.13@2194.88,968.11 v1(2194.89,1012)
  L4-Bottom w5: J1A.9@1062.99,78.74 1019.9,121.83 1019.9,378.04 1337.86,696 1906.86,696 2194.89,984.03 v1(2194.89,1012)
MC1_B15_P5: J1A.11 MC1.14 | length 1553.2
  L1-Top w5: J1A.11@1141.73,78.74 1098.64,121.83 1098.64,311.64 1393,606 2136,606 2194.88,664.88 MC1.14@2194.88,724.8
MC1_B15_P6: J1A.13 MC1.19 | length 1762.9
  L1-Top w5: v1(2253.89,1033) 2253.94,1032.95 MC1.19@2253.94,968.11
  L4-Bottom w5: J1A.13@1220.47,78.74 1177.38,121.83 1177.38,344.52 1489.86,657 1967.86,657 2253.89,943.03 v1(2253.89,1033)
MC1_B15_P7: J1A.15 MC1.20 | length 1459.2
  L1-Top w5: J1A.15@1299.21,78.74 1256.12,121.83 1256.12,321.12 1507,572 2159,572 2253.94,666.94 MC1.20@2253.94,724.8
MC1_B15_P8: J1A.19 MC1.26 | length 1357.5
  L1-Top w5: J1A.19@1456.69,78.74 1413.6,121.83 1413.6,317.74 1632.86,537 2181,537 2312.99,668.99 MC1.26@2312.99,724.8
MC1_B15_P9: J1A.21 MC1.31 | length 1572.9
  L1-Top w5: v1(2371.89,1033) 2372.05,1032.84 MC1.31@2372.05,968.11
  L4-Bottom w5: J1A.21@1535.43,78.74 1491,123.17 1491,308 1741,558 2031.86,558 2143,669.14 2143,719.14 2371.89,948.03 v1(2371.89,1033)
MC1_B15_P10: J1A.23 MC1.32 | length 1267.6
  L1-Top w5: J1A.23@1614.17,78.74 1571.08,121.83 1571.08,309.22 1743.86,482 2208,482 2372.05,646.05 MC1.32@2372.05,724.8
MC1_B15_P11: J1A.25 MC1.37 | length 1472.5
  L1-Top w5: v1(2430.89,1012) 2431.1,1011.79 MC1.37@2431.1,968.11
  L4-Bottom w5: J1A.25@1692.91,78.74 1647.26,124.39 1647.26,313.41 1822.86,489 2082,489 2252,659 2252,689 2430.89,867.89 v1(2430.89,1012)
MC1_B15_P12: J1A.27 MC1.38 | length 1181.5
  L1-Top w5: J1A.27@1771.65,78.74 1726,124.39 1726,306.15 1846.86,427 2230,427 2431.1,628.1 MC1.38@2431.1,724.8
MC1_B15_P13: J1A.29 MC1.43 | length 1450.8
  L1-Top w5: v1(2489.89,1033) 2490.16,1032.73 MC1.43@2490.16,968.11
  L4-Bottom w5: J1A.29@1850.39,78.74 1804.74,124.39 1804.74,326.74 1895,417 2115,417 2489.89,791.89 v1(2489.89,1033)
MC1_B15_P14: J1A.31 MC1.44 | length 1095.5
  L1-Top w5: J1A.31@1929.13,78.74 1883.48,124.39 1883.48,308.48 1953,378 2259,378 2490.16,609.16 MC1.44@2490.16,724.8
MC1_B15_P15: J1A.33 MC1.49 | length 1323
  L1-Top w5: v1(2548.89,1012) 2549.21,1011.68 MC1.49@2549.21,968.11
  L4-Bottom w5: J1A.33@2007.87,78.74 1962.22,124.39 1962.22,310.22 2002,350 2145,350 2548.89,753.89 v1(2548.89,1012)
MC1_B15_P16: J1A.35 MC1.50 | length 963.2
  L1-Top w5: J1A.35@2086.61,78.74 2043.52,121.83 2043.52,169 2099.52,225 2252.86,225 2549.21,521.36 MC1.50@2549.21,724.8
MC1_B15_P17: J1A.37 MC1.55 | length 1274.2
  L1-Top w5: v1(2607.89,1033) 2608.27,1032.62 MC1.55@2608.27,968.11
  L4-Bottom w5: J1A.37@2165.35,78.74 2126,118.09 2126,174 2199,247 2199,335 2655,791 2655,857 2607.89,904.11 v1(2607.89,1033)
MC1_B15_P18: J1A.39 MC1.56 | length 854.2
  L1-Top w5: J1A.39@2244.09,78.74 2205,117.83 2205,175 2228.07,198.07 2270.54,198.07 2608.27,535.8 MC1.56@2608.27,724.8
MC1_B15_X0: J1B.16 J2.2 MC1.48 | length 5142.6
  L1-Top w5: J1B.16@1929.13,275.59 1929.13,309.13 1969,349 2276,349 2529.53,602.53 MC1.48@2529.53,724.8 2529.53,755.53 2612,838 2612,867 2693,948 v1(2693,1304) ; v1(5648,2777) 5648.43,2776.57 J2.2@5648.43,2724.41
  L4-Bottom w5: v1(2693,1304) 3735.46,2346.46 5078.46,2346.46 5191,2459 5330,2459 v1(5648,2777)
MC1_B15_X1: J1B.15 J2.3 MC1.47 R6.1 | length 5285.5
  L1-Top w5: R6.1@2515,1274.62 v1(2515,1304) ; MC1.47@2529.53,968.11 2529.53,1032.64 v1(2529.89,1033) ; J2.3@5616.93,2724.41 5616.93,2776.93 v1(5617,2777)
  L4-Bottom w5: J1B.15@1850.39,275.59 1948.8,374 2127,374 2529.89,776.89 v1(2529.89,1033) 2537,1040.11 2537,1282 v1(2515,1304) 3581.08,2370.08 5068.08,2370.08 5304,2606 5446,2606 v1(5617,2777)
MC1_B15_X2: J1B.14 J2.4 MC1.42 R1.1 | length 6211.8
  L1-Top w5: J1B.14@1771.65,275.59 1894.06,398 2246,398 2470.47,622.47 MC1.42@2470.47,724.8 2470.47,766.53 2433.85,803.15 1976.38,803.15 1940.94,838.58 1940.94,1007.87 2044.07,1111 2368,1111 2437,1180 2437,1265 2446.62,1274.62 R1.1@2463,1274.62 v1(2463,1304) ; v1(5585,2777) 5585.43,2776.57 J2.4@5585.43,2724.41
  L4-Bottom w5: v1(2463,1304) 3552.7,2393.7 5057.7,2393.7 5283,2619 5427,2619 v1(5585,2777)
MC1_B15_X3: J1B.13 J2.5 MC1.41 R2.1 | length 5398.6
  L1-Top w5: R2.1@2411,1274.62 v1(2411,1304) ; MC1.41@2470.47,968.11 2470.47,1011.58 v1(2470.89,1012) ; J2.5@5553.94,2724.41 5553.94,2776.94 v1(5554,2777)
  L4-Bottom w5: J1B.13@1692.91,275.59 1866.32,449 2112,449 2470.89,807.89 v1(2470.89,1012) 2470.89,1056.11 2437,1090 2437,1278 v1(2411,1304) 3524.32,2417.32 5043.31,2417.32 5257.98,2632 5409,2632 v1(5554,2777)
MC1_B15_X4: J1B.12 J2.6 MC1.36 R3.1 | length 6206.7
  L1-Top w5: J1B.12@1614.17,275.59 1785.58,447 2218,447 2411.42,640.42 MC1.36@2411.42,724.8 2411.42,763.58 2383.5,791.5 1968.34,791.5 1929.13,830.71 1929.13,1026.13 2061,1158 2299,1158 2333,1192 2333,1263 2344.62,1274.62 R3.1@2359,1274.62 v1(2359,1304) ; v1(5522,2777) 5522.44,2776.56 J2.6@5522.44,2724.41
  L4-Bottom w5: v1(2359,1304) 3495.94,2440.94 5031.5,2440.94 5235.55,2645 5390,2645 v1(5522,2777)
MC1_B15_X5: J1B.11 J2.7 MC1.35 R4.1 R7.1 | length 5586.6
  L1-Top w5: R4.1@2255,1274.62 R7.1@2307,1274.62 v1(2307,1304) ; MC1.35@2411.42,968.11 v1@2411.42,1032.47 ; J2.7@5490.94,2724.41 5490.94,2776.94 v1(5491,2777)
  L4-Bottom w5: J1B.11@1535.43,275.59 1777.84,518 2051,518 2198,665 2198,725 2410.89,937.89 v1(2410.89,1033) 2333,1110.89 2333,1278 v1(2307,1304) 3467.57,2464.57 5015.75,2464.57 5209.18,2658 5372,2658 v1(5491,2777)
MC1_B15_X6: J1B.10 J2.8 MC1.30 R5.1 | length 6169.9
  L1-Top w5: J1B.10@1456.69,275.59 1686.1,505 2196,505 2352.36,661.36 MC1.30@2352.36,724.8 2352.36,762.64 2335.47,779.53 1960.63,779.53 1917.32,822.83 1917.32,1048.32 2143.62,1274.62 R5.1@2203,1274.62 v1(2203,1304) ; v1(5459,2777) 5459.45,2776.55 J2.8@5459.45,2724.41
  L4-Bottom w5: v1(2203,1304) 3387.19,2488.19 4962.19,2488.19 5212,2738 5420,2738 v1(5459,2777)
MC1_B15_X7: J1B.9 MC1.29 | length 1355.8
  L1-Top w5: MC1.29@2352.36,968.11 2352.36,1011.47 v1(2352.89,1012)
  L4-Bottom w5: J1B.9@1377.95,275.59 1686.36,584 1979,584 2352.89,957.89 v1(2352.89,1012)
MC1_B16_CLK_N: J1C.18 MC1.87 | length 955.7
  L1-Top w5: v1(3119.89,1033) 3120.08,1032.81 MC1.87@3120.08,968.11
  L4-Bottom w5: v1(3119.89,1033) 3119.89,977.89 3116.52,974.52 3116.52,853.96 3116.39,853.83 3116.39,840.17 3116.52,840.04 3116.52,190.57 J1C.18@3149.61,157.48
MC1_B16_CLK_P: J1C.17 MC1.85 | length 998.1
  L1-Top w5: v1(3099.89,1012) 3100.39,1011.5 MC1.85@3100.39,968.11
  L4-Bottom w5: v1(3099.89,1012) 3099.89,979.11 3106.52,972.48 3106.52,858.1 3106.39,857.98 3106.39,121.96 J1C.17@3149.61,78.74
MC1_B16_N0: J1C.2 MC1.63 | length 1135.8
  L1-Top w5: MC1.63@2883.86,968.11 v1@2883.86,1032.97
  L4-Bottom w5: J1C.2@2519.69,157.48 2466,211.17 2466,346 2822,702 2822,894.86 2883.89,956.75 v1(2883.89,1033)
MC1_B16_N1: J1C.4 MC1.64 | length 715.1
  L1-Top w5: J1C.4@2598.43,157.48 2562.78,193.13 2562.78,350.78 2883.86,671.86 MC1.64@2883.86,724.8
MC1_B16_N2: J1C.6 MC1.69 | length 1038.7
  L1-Top w5: MC1.69@2942.91,968.11 v1(2942.89,1012)
  L4-Bottom w5: J1C.6@2677.17,157.48 2641.52,193.13 2641.52,416.04 2842.33,616.86 2842.33,866.19 2942.89,966.75 v1(2942.89,1012) v1@2943.39,1011.5
MC1_B16_N3: J1C.8 MC1.70 | length 674.3
  L1-Top w5: J1C.8@2755.91,157.48 2720.26,193.13 2720.26,414.26 2942.91,636.91 MC1.70@2942.91,724.8
MC1_B16_N4: J1C.10 MC1.75 | length 1039.2
  L1-Top w5: v1(3001.89,1033) 3001.97,1032.92 MC1.75@3001.97,968.11
  L4-Bottom w5: J1C.10@2834.65,157.48 2799,193.13 2799,529 2935,665 2935,813.86 2991.89,870.75 2991.89,972.89 3001.89,982.89 v1(3001.89,1033)
MC1_B16_N5: J1C.12 MC1.76 | length 633.3
  L1-Top w5: J1C.12@2913.39,157.48 2878,192.87 2878,491 3001.97,614.97 MC1.76@3001.97,724.8
MC1_B16_N6: J1C.14 MC1.81 | length 956.5
  L1-Top w5: v1(3060.89,1012) 3061.02,1011.87 MC1.81@3061.02,968.11
  L4-Bottom w5: J1C.14@2992.13,157.48 2956.48,193.13 2956.48,531.33 3060.89,635.75 v1(3060.89,1012)
MC1_B16_N7: J1C.16 MC1.82 | length 592.8
  L1-Top w5: MC1.82@3061.02,724.8 3061.02,653.88 3035.22,628.07 3035.22,193.13 J1C.16@3070.87,157.48
MC1_B16_N8: J1C.20 MC1.88 | length 612.2
  L1-Top w5: MC1.88@3120.08,724.8 3120.08,552.92 3192.7,480.3 3192.7,193.13 J1C.20@3228.35,157.48
MC1_B16_N9: J1C.22 MC1.93 | length 951.8
  L1-Top w5: v1(3178.89,1012) 3179.13,1011.76 MC1.93@3179.13,968.11
  L4-Bottom w5: v1(3178.89,1012) 3178.89,881.11 3186.5,873.5 3186.87,873.5 3271.44,788.93 3271.44,193.13 J1C.22@3307.09,157.48
MC1_B16_N10: J1C.24 MC1.94 | length 652.9
  L1-Top w5: MC1.94@3179.13,724.8 3179.13,588.87 3350.18,417.82 3350.18,193.13 J1C.24@3385.83,157.48
MC1_B16_N11: J1C.26 MC1.99 | length 1034.4
  L1-Top w5: v1(3237.89,1033) 3238.19,1032.7 MC1.99@3238.19,968.11
  L4-Bottom w5: v1(3237.89,1033) 3237.89,887.11 3347,778 3347,612 3428.92,530.08 3428.92,193.13 J1C.26@3464.57,157.48
MC1_B16_N12: J1C.28 MC1.100 | length 693.7
  L1-Top w5: MC1.100@3238.19,724.8 3238.19,609.81 3507.66,340.34 3507.66,193.13 J1C.28@3543.31,157.48
MC1_B16_N13: J1C.30 MC1.105 | length 1033.2
  L1-Top w5: v1(3296.89,1012) 3297.24,1011.65 MC1.105@3297.24,968.11
  L4-Bottom w5: v1(3296.89,1012) 3296.89,889.11 3586.4,599.6 3586.4,193.13 J1C.30@3622.05,157.48
MC1_B16_N14: J1C.32 MC1.106 | length 749.2
  L1-Top w5: MC1.106@3297.24,724.8 3297.24,632.76 3589,341 3589,289.38 3588.96,289.34 3588.96,244.19 3616.14,217 3641.27,217 J1C.32@3700.79,157.48
MC1_B16_N15: J1C.34 MC1.111 | length 1116.1
  L1-Top w5: v1(3355.89,1033) 3356.3,1032.59 MC1.111@3356.3,968.11
  L4-Bottom w5: v1(3355.89,1033) 3355.89,957.11 3462.86,850.14 3462.86,780.14 3743.88,499.12 3743.88,193.13 J1C.34@3779.53,157.48
MC1_B16_N16: J1C.36 MC1.112 | length 840.3
  L1-Top w5: MC1.112@3356.3,724.8 3356.3,654.7 3465,546 3576,546 3822.62,299.38 3822.62,193.13 J1C.36@3858.27,157.48
MC1_B16_N17: J1C.38 MC1.117 | length 1114.9
  L1-Top w5: v1(3414.89,1012) 3415.35,1011.53 MC1.117@3415.35,968.11
  L4-Bottom w5: v1(3414.89,1012) 3414.89,946.11 3494,867 3494,786 3901.36,378.64 3901.36,193.13 J1C.38@3937.01,157.48
MC1_B16_N18: J1C.40 MC1.118 | length 930.8
  L1-Top w5: MC1.118@3415.35,724.8 3415.35,668.79 3485.14,599 3681.14,599 3980.1,300.04 3980.1,193.13 J1C.40@4015.75,157.48
MC1_B16_P0: J1C.1 MC1.61 | length 1172.6
  L1-Top w5: v1(2863.89,1012) 2864.17,1011.72 MC1.61@2864.17,968.11
  L4-Bottom w5: J1C.1@2519.69,78.74 2456,142.43 2456,350.14 2812,706.14 2812,899 2863.89,950.89 v1(2863.89,1012)
MC1_B16_P1: J1C.3 MC1.62 | length 794
  L1-Top w5: J1C.3@2598.43,78.74 2552.78,124.39 2552.78,354.92 2864.17,666.32 MC1.62@2864.17,724.8
MC1_B16_P2: J1C.5 MC1.67 | length 1158.9
  L1-Top w5: v1(2922.89,1033) 2923.23,1032.66 MC1.67@2923.23,968.11
  L4-Bottom w5: J1C.5@2677.17,78.74 2631.52,124.39 2631.52,420.18 2832.33,621 2832.33,870.33 2922.89,960.89 v1(2922.89,1033)
MC1_B16_P3: J1C.7 MC1.68 | length 753.2
  L1-Top w5: J1C.7@2755.91,78.74 2710.26,124.39 2710.26,418.4 2923.23,631.37 MC1.68@2923.23,724.8
MC1_B16_P4: J1C.9 MC1.73 | length 1076.1
  L1-Top w5: v1(2981.89,1012) 2982.28,1011.61 MC1.73@2982.28,968.11
  L4-Bottom w5: J1C.9@2834.65,78.74 2789,124.39 2789,533.14 2925,669.14 2925,818 2981.89,874.89 v1(2981.89,1012)
MC1_B16_P5: J1C.11 MC1.74 | length 712.2
  L1-Top w5: J1C.11@2913.39,78.74 2868,124.13 2868,495.14 2982.28,609.43 MC1.74@2982.28,724.8
MC1_B16_P6: J1C.13 MC1.79 | length 1077.4
  L1-Top w5: v1(3040.89,1033) 3041.34,1032.55 MC1.79@3041.34,968.11
  L4-Bottom w5: J1C.13@2992.13,78.74 2946.48,124.39 2946.48,535.48 3040.89,629.89 v1(3040.89,1033)
MC1_B16_P7: J1C.15 MC1.80 | length 671.7
  L1-Top w5: MC1.80@3041.34,724.8 3041.34,648.34 3025.22,632.22 3025.22,124.39 J1C.15@3070.87,78.74
MC1_B16_P8: J1C.19 MC1.86 | length 699.1
  L1-Top w5: MC1.86@3100.39,724.8 3100.39,558.46 3182.7,476.16 3182.7,124.39 J1C.19@3228.35,78.74
MC1_B16_P9: J1C.21 MC1.91 | length 1081.7
  L1-Top w5: v1(3158.89,1033) 3159.45,1032.44 MC1.91@3159.45,968.11
  L4-Bottom w5: v1@3159.39,1032.5 v1(3158.89,1033) 3158.89,964.11 3168.89,954.11 3168.89,876.97 3182.36,863.5 3182.72,863.5 3261.44,784.79 3261.44,124.39 J1C.21@3307.09,78.74
MC1_B16_P10: J1C.23 MC1.92 | length 739.8
  L1-Top w5: MC1.92@3159.45,724.8 3159.45,594.41 3340.18,413.68 3340.18,124.39 J1C.23@3385.83,78.74
MC1_B16_P11: J1C.25 MC1.97 | length 1079.1
  L1-Top w5: MC1.97@3218.5,968.11 3218.5,1011.61 v1(3218.89,1012)
  L4-Bottom w5: v1(3218.89,1012) 3218.89,981.11 3227.89,972.11 3227.89,882.97 3337,773.86 3337,607.86 3418.92,525.94 3418.92,124.39 J1C.25@3464.57,78.74
MC1_B16_P12: J1C.27 MC1.98 | length 780.6
  L1-Top w5: MC1.98@3218.5,724.8 3218.5,615.35 3497.66,336.2 3497.66,124.39 J1C.27@3543.31,78.74
MC1_B16_P13: J1C.29 MC1.103 | length 1161.8
  L1-Top w5: MC1.103@3277.56,968.11 3277.56,1032.67 v1(3277.89,1033)
  L4-Bottom w5: v1(3277.89,1033) 3277.89,893.97 3576.4,595.46 3576.4,124.39 J1C.29@3622.05,78.74
MC1_B16_P14: J1C.31 MC1.104 | length 836
  L1-Top w5: MC1.104@3277.56,724.8 3277.56,638.3 3578,337.86 3578,241 3612,207 3637,207 3661,183 3661,118.53 J1C.31@3700.79,78.74
MC1_B16_P15: J1C.33 MC1.109 | length 1160.6
  L1-Top w5: MC1.109@3336.61,968.11 3336.61,1011.73 v1(3336.89,1012)
  L4-Bottom w5: v1(3336.89,1012) 3336.89,961.97 3452.86,846 3452.86,776 3733.88,494.98 3733.88,124.39 J1C.33@3779.53,78.74
MC1_B16_P16: J1C.35 MC1.110 | length 927.2
  L1-Top w5: MC1.110@3336.61,724.8 3336.61,660.24 3460.86,536 3571.86,536 3812.62,295.24 3812.62,124.39 J1C.35@3858.27,78.74
MC1_B16_P17: J1C.37 MC1.115 | length 1243.4
  L1-Top w5: MC1.115@3395.67,968.11 3395.67,1032.78 v1(3395.89,1033)
  L4-Bottom w5: v1(3395.89,1033) 3395.89,950.97 3484,862.86 3484,781.86 3891.36,374.5 3891.36,124.39 J1C.37@3937.01,78.74
MC1_B16_P18: J1C.39 MC1.116 | length 1017.7
  L1-Top w5: MC1.116@3395.67,724.8 3395.67,674.33 3481,589 3677,589 3970.1,295.9 3970.1,124.39 J1C.39@4015.75,78.74
MC1_B16_X0: J1D.16 J3.2 MC1.108 | length 5209.5
  L1-Top w5: v1(3602,1304) 3602,950 3686,866 3686,829 3633,776 3334,776 3316.93,758.93 MC1.108@3316.93,724.8 3316.93,648.07 3689.41,275.59 J1D.16@3700.79,275.59 ; v1(6396,2777) 6396.46,2776.54 J3.2@6396.46,2724.41
  L4-Bottom w5: v1(3602,1304) 4223.2,1925.2 5286.2,1925.2 5463.36,2102.36 6055.36,2102.36 6236,2283 6236,2469 6396,2629 v1(6396,2777)
MC1_B16_X1: J1D.15 J3.3 MC1.107 R13.1 | length 5177.2
  L1-Top w5: R13.1@3304,1274.62 v1(3304,1304) ; v1(3316.89,1033) 3316.93,1032.96 MC1.107@3316.93,968.11 ; J3.3@6364.96,2724.41 6364.96,2776.96 v1(6365,2777)
  L4-Bottom w5: J1D.15@3622.05,275.59 3622.05,585.95 3400,808 3400,862 3316.89,945.11 v1(3316.89,1033) 3319.5,1035.61 3319.5,1288.5 v1(3304,1304) 3948.82,1948.82 5271.82,1948.82 5448.98,2125.98 6049.98,2125.98 6221,2297 6221,2477 6365,2621 v1(6365,2777)
MC1_B16_X2: J1D.14 J3.4 MC1.102 R8.2 | length 5399.9
  L1-Top w5: v1(3252,1304) R8.2@3252,1274.62 3234.62,1274.62 3226,1266 3226,1188 3328,1086 3424,1086 3468,1042 3468,930 3400,862 3400,828 3369,797 3288,797 3257.87,766.87 MC1.102@3257.87,724.8 3257.87,624.13 3543.31,338.69 J1D.14@3543.31,275.59 ; v1(6333,2777) 6333.46,2776.54 J3.4@6333.46,2724.41
  L4-Bottom w5: v1(3252,1304) 3920.44,1972.44 5266.44,1972.44 5443.61,2149.61 6042.61,2149.61 6208,2315 6208,2491 6333,2616 v1(6333,2777)
MC1_B16_X3: J1D.13 J3.5 MC1.101 R9.2 | length 5170.5
  L1-Top w5: R9.2@3200,1274.62 v1(3200,1304) ; MC1.101@3257.87,968.11 v1@3257.87,1011.98 ; J3.5@6301.97,2724.41 v1@6301.97,2776.97
  L4-Bottom w5: J1D.13@3464.57,275.59 3464.57,529.43 3361,633 3361,788 3257.89,891.11 v1(3257.89,1012) 3257.89,1122.11 3226,1154 3226,1278 v1(3200,1304) 3892.06,1996.06 5247.06,1996.06 5424.23,2173.23 6030.23,2173.23 6188,2331 6188,2506 6302,2620 v1(6302,2777)
MC1_B16_X4: J1D.12 J3.6 MC1.96 R10.2 | length 5527.2
  L1-Top w5: v1(3148,1304) R10.2@3148,1274.62 3132.62,1274.62 3122,1264 3122,1188 3080,1146 2935,1146 2834,1045 2834,941 2867,908 3102,908 3150,860 3150,814 3198.82,765.18 MC1.96@3198.82,724.8 3198.82,600.18 3385.83,413.17 J1D.12@3385.83,275.59 ; v1(6270,2777) 6270.47,2776.53 J3.6@6270.47,2724.41
  L4-Bottom w5: v1(3148,1304) 3863.69,2019.69 5236.69,2019.69 5413.85,2196.85 5842.85,2196.85 5958,2312 5958,2523 6050,2615 6108,2615 v1(6270,2777)
MC1_B16_X5: J1D.11 J3.7 MC1.95 R11.2 R14.1 | length 5190.9
  L1-Top w5: R11.2@3044,1274.62 R14.1@3096,1274.62 v1(3096,1304) ; MC1.95@3198.82,968.11 3198.82,1032.93 v1(3198.89,1033) ; J3.7@6238.98,2724.41 v1@6238.98,2776.98
  L4-Bottom w5: J1D.11@3307.09,275.59 3307.09,779.91 3198.89,888.11 v1(3198.89,1033) 3122,1109.89 3122,1278 v1(3096,1304) 3835.31,2043.31 5222.31,2043.31 5399.47,2220.47 5834.47,2220.47 5936,2322 5936,2532 6037,2633 6095,2633 v1(6239,2777)
MC1_B16_X6: J1D.10 J3.8 MC1.90 R12.2 | length 5390.9
  L1-Top w5: v1(2992,1304) R12.2@2992,1274.62 2972.62,1274.62 2819,1121 2819,932 2870,881 2885,881 2900,866 2900,831 2937,794 3106,794 3139.76,760.24 MC1.90@3139.76,724.8 3139.76,573.24 3228.35,484.65 J1D.10@3228.35,275.59 ; v1(6207,2777) 6207.48,2776.52 J3.8@6207.48,2724.41
  L4-Bottom w5: v1(2992,1304) 3754.93,2066.93 5212.93,2066.93 5390.09,2244.09 5829.09,2244.09 5912,2327 5912,2539 6025,2652 6082,2652 v1(6207,2777)
MC1_B16_X7: J1D.9 MC1.89 | length 784.4
  L1-Top w5: MC1.89@3139.76,968.11 3139.76,1011.87 v1(3139.89,1012)
  L4-Bottom w5: v1(3139.89,1012) 3139.89,922.11 3149.61,912.39 J1D.9@3149.61,275.59
MC1_VREF1: J1D.18 MC1.114 | length 718.7
  L1-Top w5: MC1.114@3375.98,724.8 3375.98,667.02 3478,565 3597,565 3858.27,303.73 J1D.18@3858.27,275.59
MC2_B12_CLK_N: J2A.18 MC2.27 | length 1465.6
  L1-Top w5: J2A.18@1377.95,3877.95 1418,3837.91 1418,3776 1344,3702 1344,3642.14 1544.14,3442 2197,3442 2332.68,3306.32 MC2.27@2332.68,3251.58
MC2_B12_CLK_P: J2A.17 MC2.25 | length 1353.8
  L1-Top w5: J2A.17@1377.95,3799.21 1334,3755.26 1334,3638 1540,3432 2192.86,3432 2312.99,3311.87 MC2.25@2312.99,3251.58
MC2_B12_N0: J2A.2 MC2.3 | length 1733.7
  L1-Top w5: J2A.2@748.03,3877.95 792,3833.98 792,3657.14 1148.14,3301 2085.02,3301 2096.46,3289.56 MC2.3@2096.46,3251.58
MC2_B12_N1: J2A.4 MC2.4 | length 1912.4
  L1-Top w5: v1(2096,2944) 2096.46,2944.46 MC2.4@2096.46,3008.27
  L4-Bottom w5: J2A.4@826.77,3877.95 869.86,3834.86 869.86,3537.28 1413.14,2994 2076,2994 2096,2974 v1(2096,2944)
MC2_B12_N2: J2A.6 MC2.9 | length 1638.2
  L1-Top w5: J2A.6@905.51,3877.95 949,3834.46 949,3656.14 1277.14,3328 2120.48,3328 2155.51,3292.96 MC2.9@2155.51,3251.58
MC2_B12_N3: J2A.8 MC2.10 | length 1836.4
  L1-Top w5: v1(2155,2964) 2155.51,2964.51 MC2.10@2155.51,3008.27
  L4-Bottom w5: J2A.8@984.25,3877.95 1027.34,3834.86 1027.34,3440.8 1444.14,3024 2115.14,3024 2155,2984.14 v1(2155,2964)
MC2_B12_N4: J2A.10 MC2.15 | length 1541
  L1-Top w5: J2A.10@1062.99,3877.95 1107,3833.94 1107,3659.14 1407.14,3359 2154.14,3359 2214.57,3298.58 MC2.15@2214.57,3251.58
MC2_B12_N5: J2A.12 MC2.16 | length 1820.7
  L1-Top w5: MC2.16@2214.57,3008.27 2214.57,2944.43 v1(2215,2944)
  L4-Bottom w5: J2A.12@1141.73,3877.95 1184.82,3834.86 1184.82,3359.32 1492.14,3052 2137,3052 2215,2974 v1(2215,2944)
MC2_B12_N6: J2A.14 MC2.21 | length 1555.1
  L1-Top w5: J2A.14@1220.47,3877.95 1258,3840.43 1258,3776 1184.82,3702.82 1184.82,3644.32 1438.14,3391 2175.48,3391 2273.62,3292.85 MC2.21@2273.62,3251.58
MC2_B12_N7: J2A.16 MC2.22 | length 1776.6
  L1-Top w5: MC2.22@2273.62,3008.27 2273.62,2964.38 v1(2274,2964)
  L4-Bottom w5: J2A.16@1299.21,3877.95 1339,3838.17 1339,3783 1263.56,3707.56 1263.56,3373.58 1555.14,3082 2156,3082 v1(2274,2964)
MC2_B12_N8: J2A.20 MC2.28 | length 1696.7
  L1-Top w5: MC2.28@2332.68,3008.27 2332.68,2944.32 v1(2333,2944)
  L4-Bottom w5: J2A.20@1456.69,3877.95 1496,3838.65 1496,3780 1421.04,3705.04 1421.04,3421.1 1685.14,3157 1953.52,3157 1954.02,3157.5 2150.5,3157.5 2333,2975 v1(2333,2944)
MC2_B12_N9: J2A.22 MC2.33 | length 1383.6
  L1-Top w5: J2A.22@1535.43,3877.95 1575,3838.39 1575,3779 1499.78,3703.78 1499.78,3638.36 1644.14,3494 2225,3494 2391.73,3327.27 MC2.33@2391.73,3251.58
MC2_B12_N10: J2A.24 MC2.34 | length 1530.2
  L1-Top w5: v1(2391,2964) 2391.73,2964.73 MC2.34@2391.73,3008.27
  L4-Bottom w5: J2A.24@1614.17,3877.95 1654,3838.13 1654,3779 1578.52,3703.52 1578.52,3477.62 1803.14,3253 2123,3253 2391,2985 v1(2391,2964)
MC2_B12_N11: J2A.26 MC2.39 | length 1304.1
  L1-Top w5: J2A.26@1692.91,3877.95 1733,3837.87 1733,3776 1657.26,3700.26 1657.26,3629.88 1737.14,3550 2251,3550 2450.79,3350.21 MC2.39@2450.79,3251.58
MC2_B12_N12: J2A.28 MC2.40 | length 1443.4
  L1-Top w5: MC2.40@2450.79,3008.27 2450.79,2944.21 v1(2451,2944)
  L4-Bottom w5: J2A.28@1771.65,3877.95 1811,3838.61 1811,3781 1736,3706 1736,3539.14 1886.14,3389 2059.48,3389 2142.5,3305.98 2142.5,3297.64 2451,2989.14 v1(2451,2944)
MC2_B12_N13: J2A.30 MC2.45 | length 1212.6
  L1-Top w5: J2A.30@1850.39,3877.95 1890,3838.35 1890,3781 1816,3707 1816,3632.14 1852.14,3596 2282,3596 2509.84,3368.16 MC2.45@2509.84,3251.58
MC2_B12_N14: J2A.32 MC2.46 | length 1342.2
  L1-Top w5: MC2.46@2509.84,3008.27 2509.84,2964.16 v1(2510,2964)
  L4-Bottom w5: J2A.32@1929.13,3877.95 1969,3838.09 1969,3777 1893.48,3701.48 1893.48,3537.66 1991.14,3440 2129,3440 2510,3059 v1(2510,2964)
MC2_B12_N15: J2A.34 MC2.51 | length 1000.4
  L1-Top w5: J2A.34@2007.87,3877.95 2053,3832.83 2053,3657.14 2070.14,3640 2312,3640 2568.9,3383.1 MC2.51@2568.9,3251.58
MC2_B12_N16: J2A.36 MC2.52 | length 1271.9
  L1-Top w5: MC2.52@2568.9,3008.27 2568.9,2944.1 v1(2569,2944)
  L4-Bottom w5: J2A.36@2086.61,3877.95 2126,3838.57 2126,3783 2050.96,3707.96 2050.96,3569.18 2127.14,3493 2147,3493 2569,3071 v1(2569,2944)
MC2_B12_N17: J2A.38 MC2.57 | length 832.8
  L1-Top w5: J2A.38@2165.35,3877.95 2205,3838.31 2205,3773.71 2240.71,3738 2266,3738 2627.95,3376.05 MC2.57@2627.95,3251.58
MC2_B12_N18: J2A.40 MC2.58 | length 1117.3
  L1-Top w5: MC2.58@2627.95,3008.27 v1@2627.95,2964.05 ; v1@2627.95,2964.05 v1(2628,2964)
  L4-Bottom w5: J2A.40@2244.09,3877.95 2462,3660.05 2462,3227.14 2628,3061.14 v1(2628,2964)
MC2_B12_P0: J2A.1 MC2.1 | length 1641
  L1-Top w5: J2A.1@748.03,3799.21 782,3765.24 782,3653 1144,3291 2071,3291 2076.77,3285.23 MC2.1@2076.77,3251.58
MC2_B12_P1: J2A.3 MC2.2 | length 1777
  L1-Top w5: MC2.2@2076.77,3008.27 2076.77,2964.23 v1(2077,2964)
  L4-Bottom w5: J2A.3@826.77,3799.21 859.86,3766.12 859.86,3533.14 1409,2984 2057,2984 v1(2077,2964)